# EAGLE board STX3Micro (EAGLE 6.5.0)
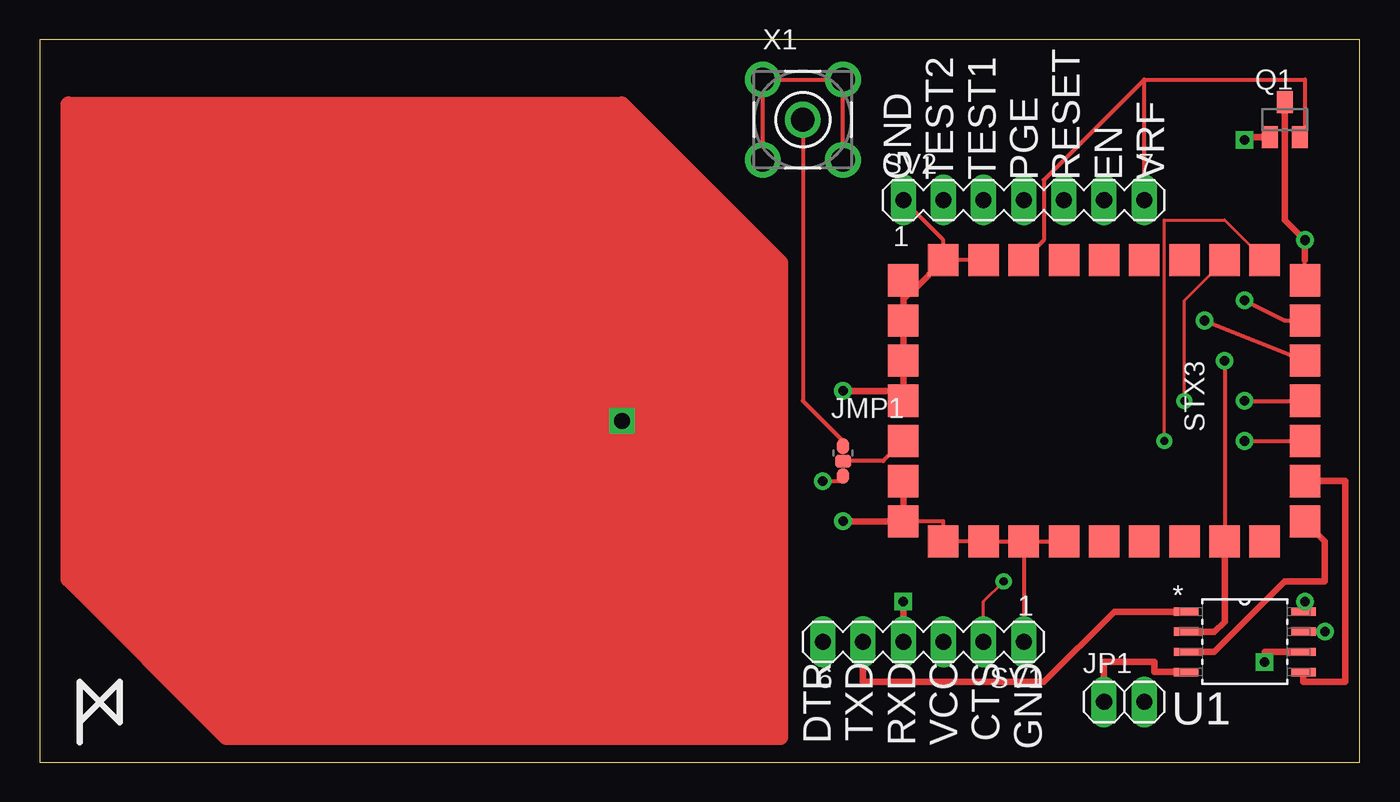
[diagram p0: board, top side]
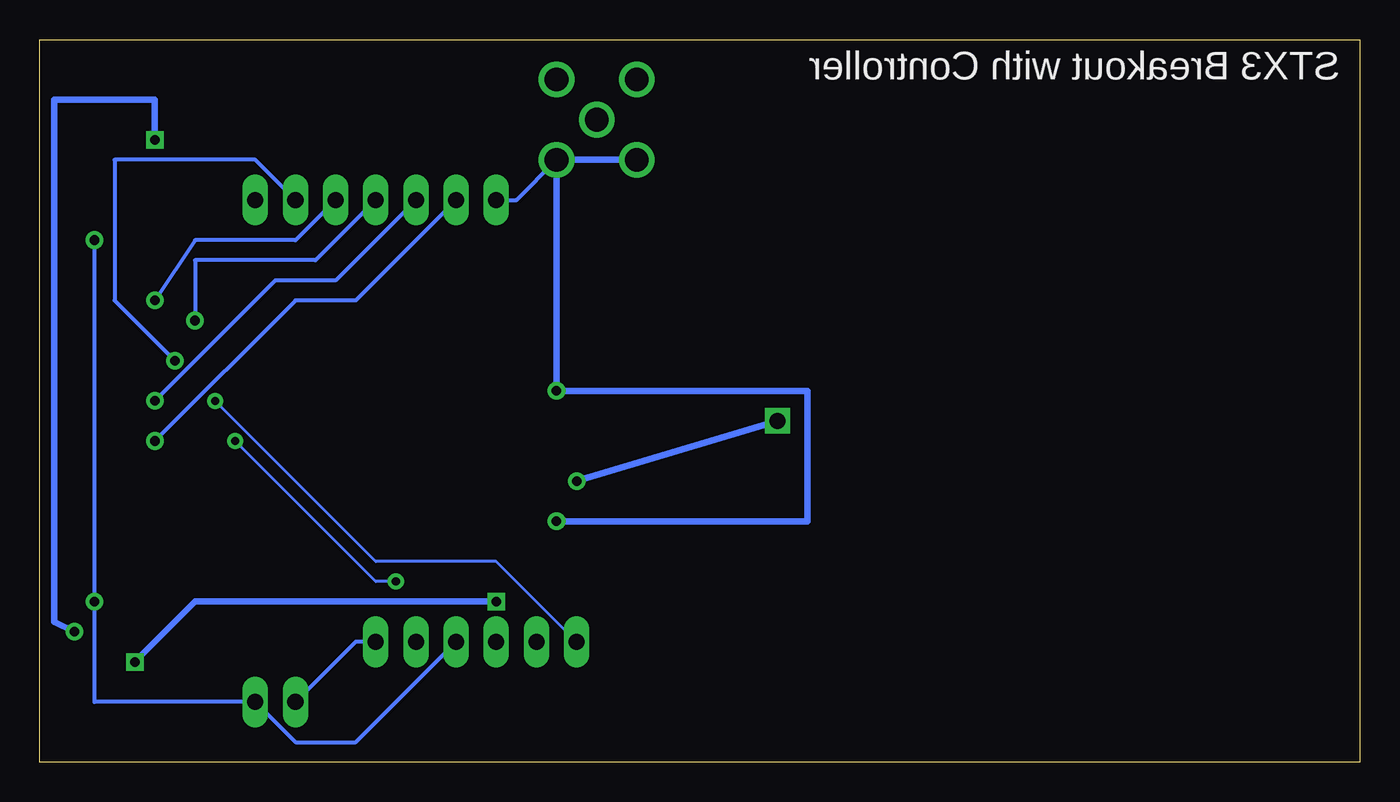
[diagram p1: board, bottom side, seen from below]

Size 83.49 x 45.71 mm. Coordinates in mm from the lower left corner, seen from the top.
Outline: 0,0 83.49,0 83.49,45.71 0,45.71 0,0
Copper layers (1*16): Top 0.035mm / dielectric 1.5mm / Bottom 0.035mm
Design rules "SparkFun": minimum track width 8mil, minimum drill 20mil, track to track 8mil, track to pad 8mil, pad to pad 8mil, via to via 8mil, smd to smd 8mil, copper to edge 10mil, drill to drill 8mil, minimum pad ring 12mil, minimum via ring 10mil, stop-mask expansion 4mil, vias tented up to drill 25mil, thermal gap 10mil

## Footprints (pad centres in the part's own frame; a part is rotated, then mirrored left to right if it is on the bottom)
C0R-JMP = smd 0.8 x 1: 1 0,0.938; 3 0,-0.938 | smd 1 x 0.8: 2 0,0
1X02 = drill 1.016 long: 1 -1.27,0; 2 1.27,0
SOT23 = smd 1 x 1.4: 1 -0.95,-1.1; 2 0.95,-1.1; 3 0,1.1
MA06-1 = drill 1.016 long: 1 -6.35,0; 2 -3.81,0; 3 -1.27,0; 4 1.27,0; 5 3.81,0; 6 6.35,0
MA07-1 = drill 1.016 long: 1 -7.62,0; 2 -5.08,0; 3 -2.54,0; 4 0,0; 5 2.54,0; 6 5.08,0; 7 7.62,0
SOIC127P798X216-8N = smd 1.549 x 0.533: 1 -3.708,1.905; 2 -3.708,0.635; 3 -3.708,-0.635; 4 -3.708,-1.905; 5 3.708,-1.905; 6 3.708,-0.635; 7 3.708,0.635; 8 3.708,1.905
STX3 = smd 2.032 x 1.93: 1 -8.89,10.16; 2 -8.89,7.62; 3 -8.89,5.08; 4 -8.89,2.54; 5 -8.89,0; 6 -8.89,-2.54; 7 -8.89,-5.08; 8 -8.89,-7.62; 9 -8.89,-10.16; 10 -7.62,-12.7; 11 -5.08,-12.7; 12 -2.54,-12.7; 13 0,-12.7; 14 2.54,-12.7; 15 5.08,-12.7; 16 7.62,-12.7; 17 8.89,-10.16; 18 8.89,-7.62; 19 8.89,-5.08; 20 8.89,-2.54; 21 8.89,0; 22 8.89,2.54; 23 8.89,5.08; 24 8.89,7.62; 25 8.89,10.16; 26 7.62,12.7; 27 5.08,12.7; 28 2.54,12.7; 29 0,12.7; 30 -2.54,12.7; 31 -5.08,12.7; 32 -7.62,12.7
GSANTENNA = drill 1 square: P$1 0,0
LTI-SASF54GT = drill 1.5 pad 2.2: 1 0,0; 2 -2.54,2.54; 3 2.54,2.54; 4 2.54,-2.54; 5 -2.54,-2.54

## Placement (x,y rotation side)
JMP1  0R-JUMPC  [C0R-JMP]  50.8,19.05 0 top
JP1  [1X02]  68.58,3.81 0 top
Q1  BSS84  [SOT23]  78.74,40.64 0 top
SV1  [MA06-1]  55.88,7.62 180 top
SV2  [MA07-1]  62.23,35.56 0 top
U1  ATTINY85-20SU  [SOIC127P798X216-8N]  76.2,7.62 0 top
U$1  [STX3]  67.31,22.86 270 top
U$2  GSANTENNA  [GSANTENNA]  36.83,21.59 0 top
X1  LTI-SASF54GT  [LTI-SASF54GT]  48.26,40.64 0 top

## Library data of the parts
JMP1 = jump-0r-smd
JP1 = pinhead
Q1 = transistor-small-signal
SV1 SV2 = con-lstb; OC_FARNELL: unknown; OC_NEWARK: unknown
U1 = Atmel_By_element14_Batch_1-00; MPN: ATTINY85-20SU; OC_FARNELL: 1455164; OC_NEWARK: 58M3797; PACKAGE: SOIC-8; SUPPLIER: Atmel
U$1 U$2 = STX3
X1 = con-coax; OC_FARNELL: unknown; OC_NEWARK: unknown

## Nets
N$1: SV1.5 U1.1
N$2: U1.3 U$1.26
N$3: U1.5 U$1.27
N$4: JP1.2 Q1.3 SV1.3 U1.8 U$1.32
N$5: SV1.4 U1.6
N$6: SV2.2 U$1.28
N$7: JMP1.2 U$1.14
N$8: JMP1.3 U$2.P$1
N$9: SV2.3 U$1.29
N$10: SV2.4 U$1.30
N$11: SV2.5 U$1.31
N$12: SV2.6 U1.2 U$1.24
N$13: Q1.2 SV2.7 U$1.7
N$14: JP1.1 SV1.1 SV2.1 U1.4 U$1.8 U$1.9 U$1.10 U$1.11 U$1.12 U$1.13 U$1.15 U$1.16 U$1.17 U$1.18 U$1.19 U$1.20 X1.2 X1.3 X1.4 X1.5
N$15: JMP1.1 X1.1
N$16: Q1.1 U1.7
N$17: SV1.6 U$1.2
N$18: SV1.2 U$1.1

## Tracks (layer width: path | path; a pad name or v marks a point on that pad's centre or on a via)
N$1
  Top 0.406: U1.1 67.95,9.52 63.5,5.08 52.07,5.08 SV1.5
N$2
  Top 0.406: U1.3 74.3,6.98 78.74,11.43 81.28,11.43 81.28,13.97 U$1.26
N$3
  Top 0.406: U$1.27 82.55,17.78 82.55,5.08 79.91,5.08 U1.5
N$4  (via drill 0.6, 0.61)
  Top 0.254: U$1.32 80.01,31.75 | 78.74,41.91 Q1.3
  Top 0.406: U1.8 79.91,10.06 v80.01,10.16 | 80.01,31.75 v80.01,33.02 78.74,34.29 Q1.3
  Bottom 0.254: SV1.3 63.5,1.27 67.31,1.27 JP1.2 80.01,3.81 v80.01,10.16 v80.01,33.02
N$5  (via drill 0.6)
  Top 0.406: v77.47,6.35 77.47,6.98 U1.6 | v54.61,10.16 SV1.4
  Bottom 0.406: v54.61,10.16 73.66,10.16 v77.47,6.35
N$6  (via drill 0.61)
  Top 0.254: v76.2,20.32 U$1.28
  Bottom 0.254: v76.2,20.32 67.31,29.21 63.5,29.21 SV2.2
N$7
  Top 0.254: JMP1.2 53.34,19.05 U$1.14
N$8  (via drill 0.6)
  Top 0.254: v49.53,17.78 50.8,17.78 JMP1.3
  Top 0.406: 36.83,17.78 U$2.P$1
  Bottom 0.406: U$2.P$1 v49.53,17.78
  other vias: 36.83,21.59
N$9  (via drill 0.61)
  Top 0.254: v76.2,22.86 U$1.29
  Bottom 0.254: v76.2,22.86 68.58,30.48 64.77,30.48 SV2.3
N$10  (via drill 0.61)
  Top 0.254: v73.66,27.94 U$1.30
  Bottom 0.254: v73.66,27.94 73.66,31.75 66.04,31.75 SV2.4
N$11  (via drill 0.61)
  Top 0.254: U$1.31 78.74,27.94 v76.2,29.21
  Bottom 0.254: v76.2,29.21 73.66,33.02 67.31,33.02 SV2.5
N$12  (via drill 0.61)
  Top 0.254: v74.93,25.4 U$1.24
  Top 0.406: U1.2 74.3,8.25 74.93,8.89 U$1.24
  Bottom 0.254: v74.93,25.4 78.74,29.21 78.74,38.1 69.85,38.1 SV2.6
N$13
  Top 0.254: 69.85,43.18 80.01,43.18 80.01,39.37 Q1.2 | SV2.7 69.85,43.18 | U$1.7 63.5,33.02 63.5,36.83 69.85,43.18
N$14  (via drill 0.6)
  Top 0.254: U$1.19 U$1.18 U$1.17 57.15,15.24 U$1.16 | U$1.19 U$1.20 | U$1.19 SV1.1 | X1.5 X1.2 X1.3 X1.4 | U$1.8 U$1.9 57.15,33.02 SV2.1 | U$1.13 54.61,23.49 U$1.12 U$1.11 54.61,29.21 | U$1.10 54.61,29.21 | 54.61,29.21 55.25,29.84
  Top 0.406: JP1.1 67.31,6.35 70.48,6.35 70.48,5.71 U1.4 | U$1.15 U$1.16 v50.8,15.24 | v50.8,23.49 54.61,23.49 U$1.10 55.25,30.48 55.25,29.84 U$1.9
  Bottom 0.254: JP1.1 63.5,7.62 SV1.1 | X1.4 53.34,35.56 SV2.1
  Bottom 0.406: X1.5 X1.4 v50.8,23.49 34.93,23.49 34.93,15.24 v50.8,15.24
N$15
  Top 0.254: X1.1 48.26,22.86 50.8,20.32 JMP1.1
N$16  (via drill 0.6)
  Top 0.406: Q1.1 76.37,39.54 v76.2,39.37 | U1.7 v81.28,8.25
  Bottom 0.406: v76.2,39.37 76.2,41.91 82.55,41.91 82.55,8.89 v81.28,8.25
N$17  (via drill 0.51)
  Top 0.203: U$1.2 72.39,29.21 v72.39,22.86
  Bottom 0.203: v72.39,22.86 62.23,12.7 54.61,12.7 SV1.6
N$18  (via drill 0.51)
  Top 0.203: U$1.1 74.93,34.29 71.12,34.29 v71.12,20.32 | v60.96,11.43 59.69,10.16 SV1.2
  Bottom 0.203: v71.12,20.32 62.23,11.43 v60.96,11.43

## Text on the board
tPlace: GND / TEST2 / TEST1 / PGE / RESET / EN / VRF | DTR / TXD / RXD / VCC / CTS / GND
bPlace: STX3 Breakout with Controller